# Altium PCB larar6.PcbDoc
Units mm, origin at the board's own origin, x right, y up, seen from the top; angles counter-clockwise.
Board outline 55.88 x 52.96 mm, 2 copper layers (Top Layer, Bottom Layer), stack 1.671 mm thick; 45 components, 51 nets, 267 pads, 125 vias.
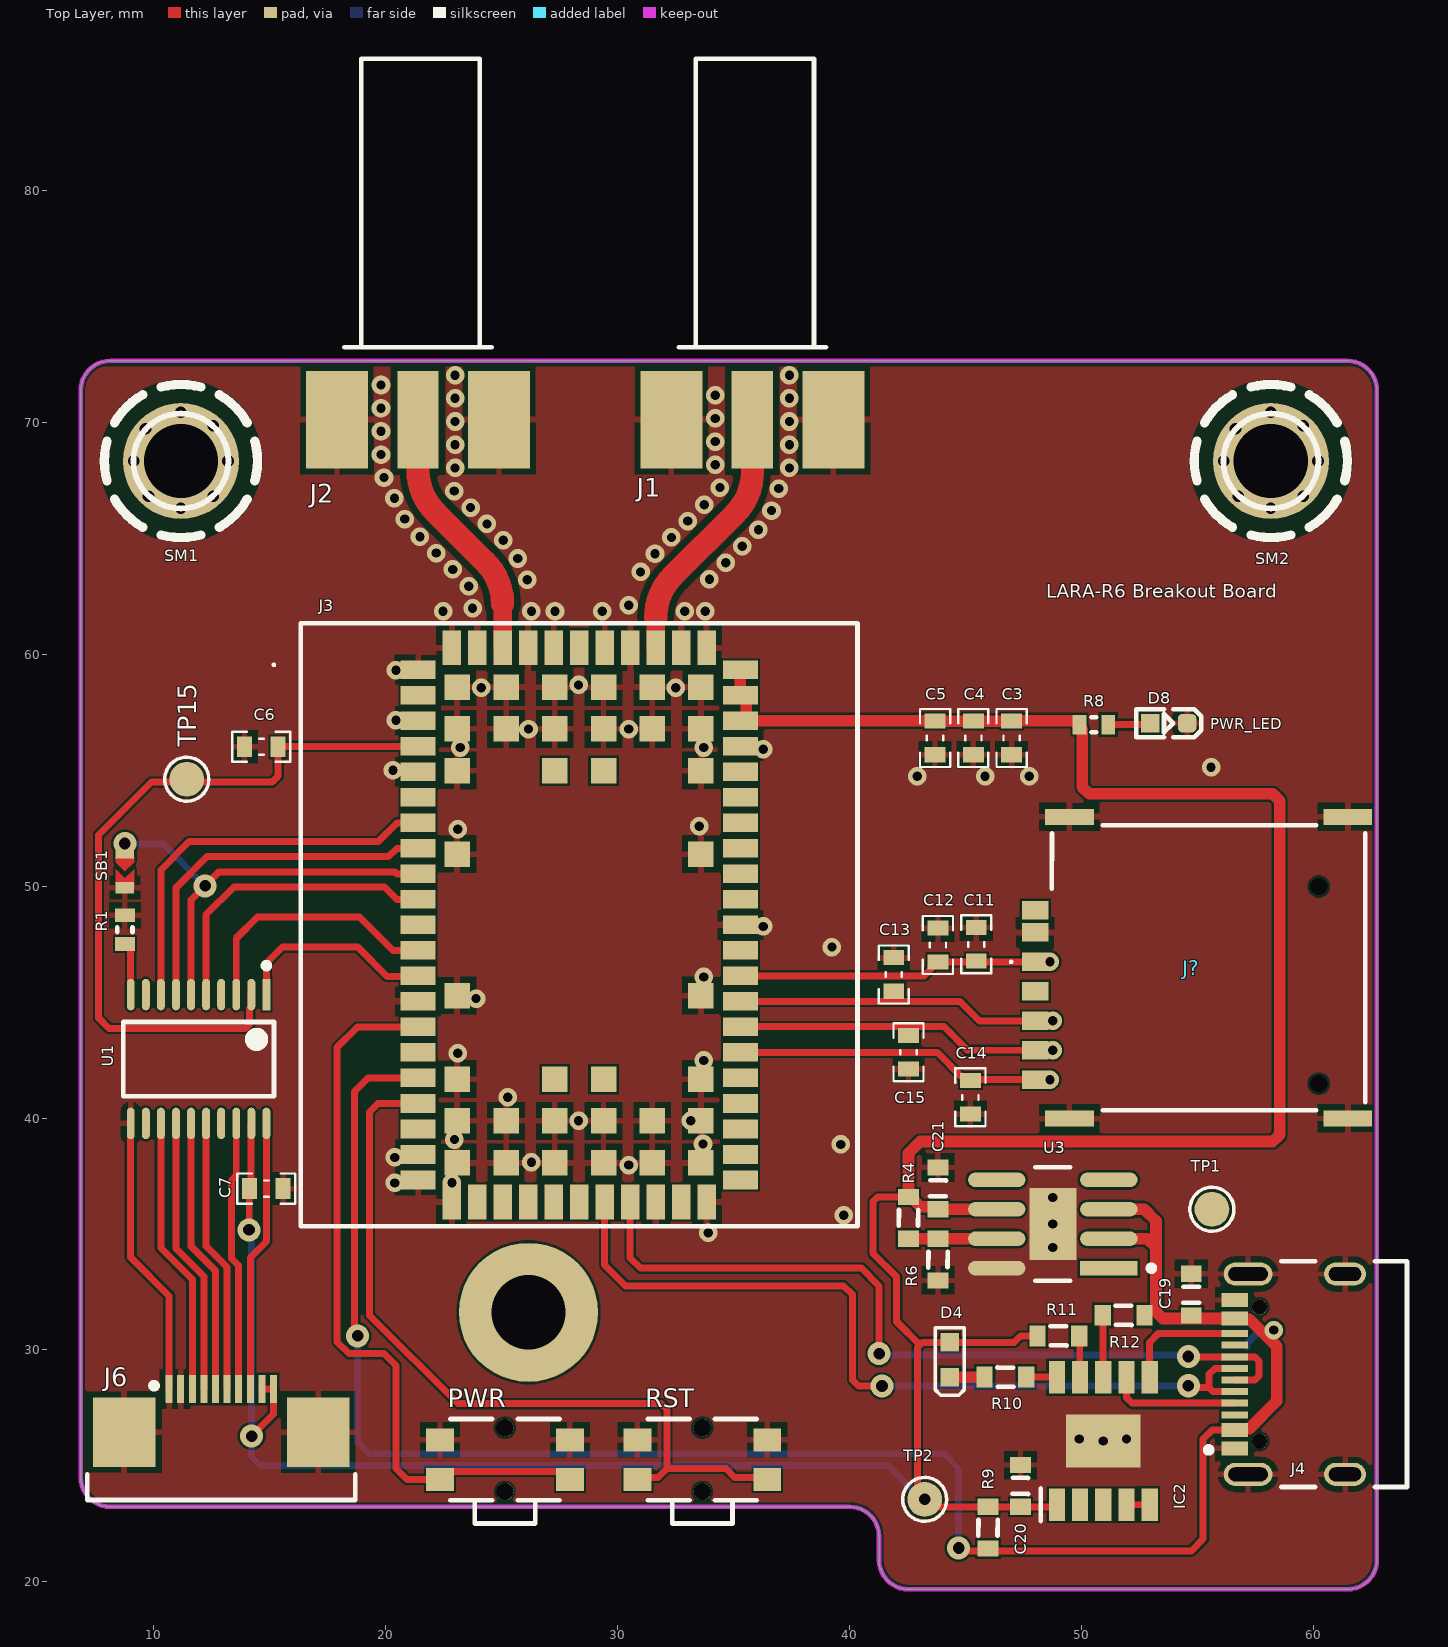
[diagram p0: Top Layer view]
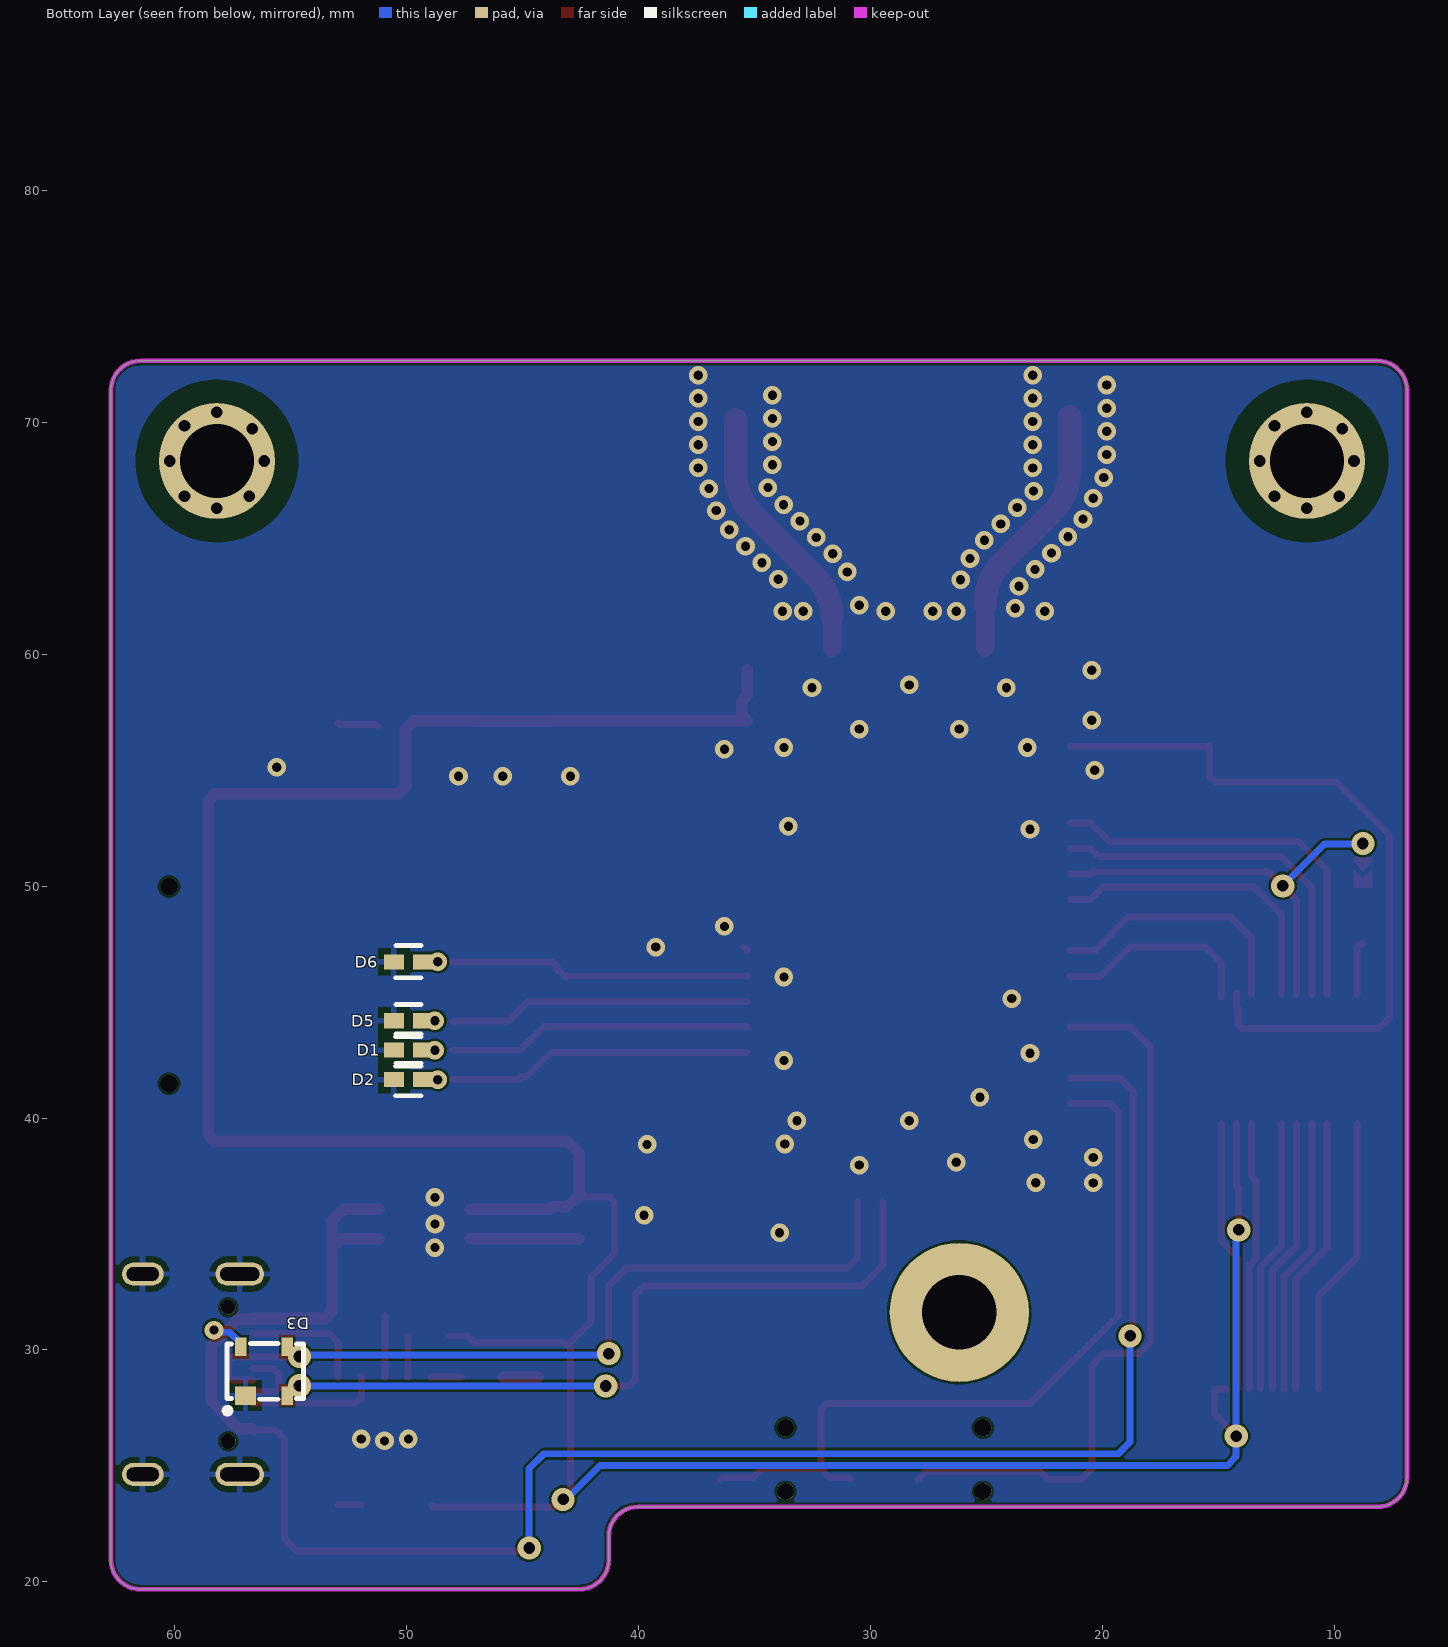
[diagram p1: Bottom Layer view, seen from below]
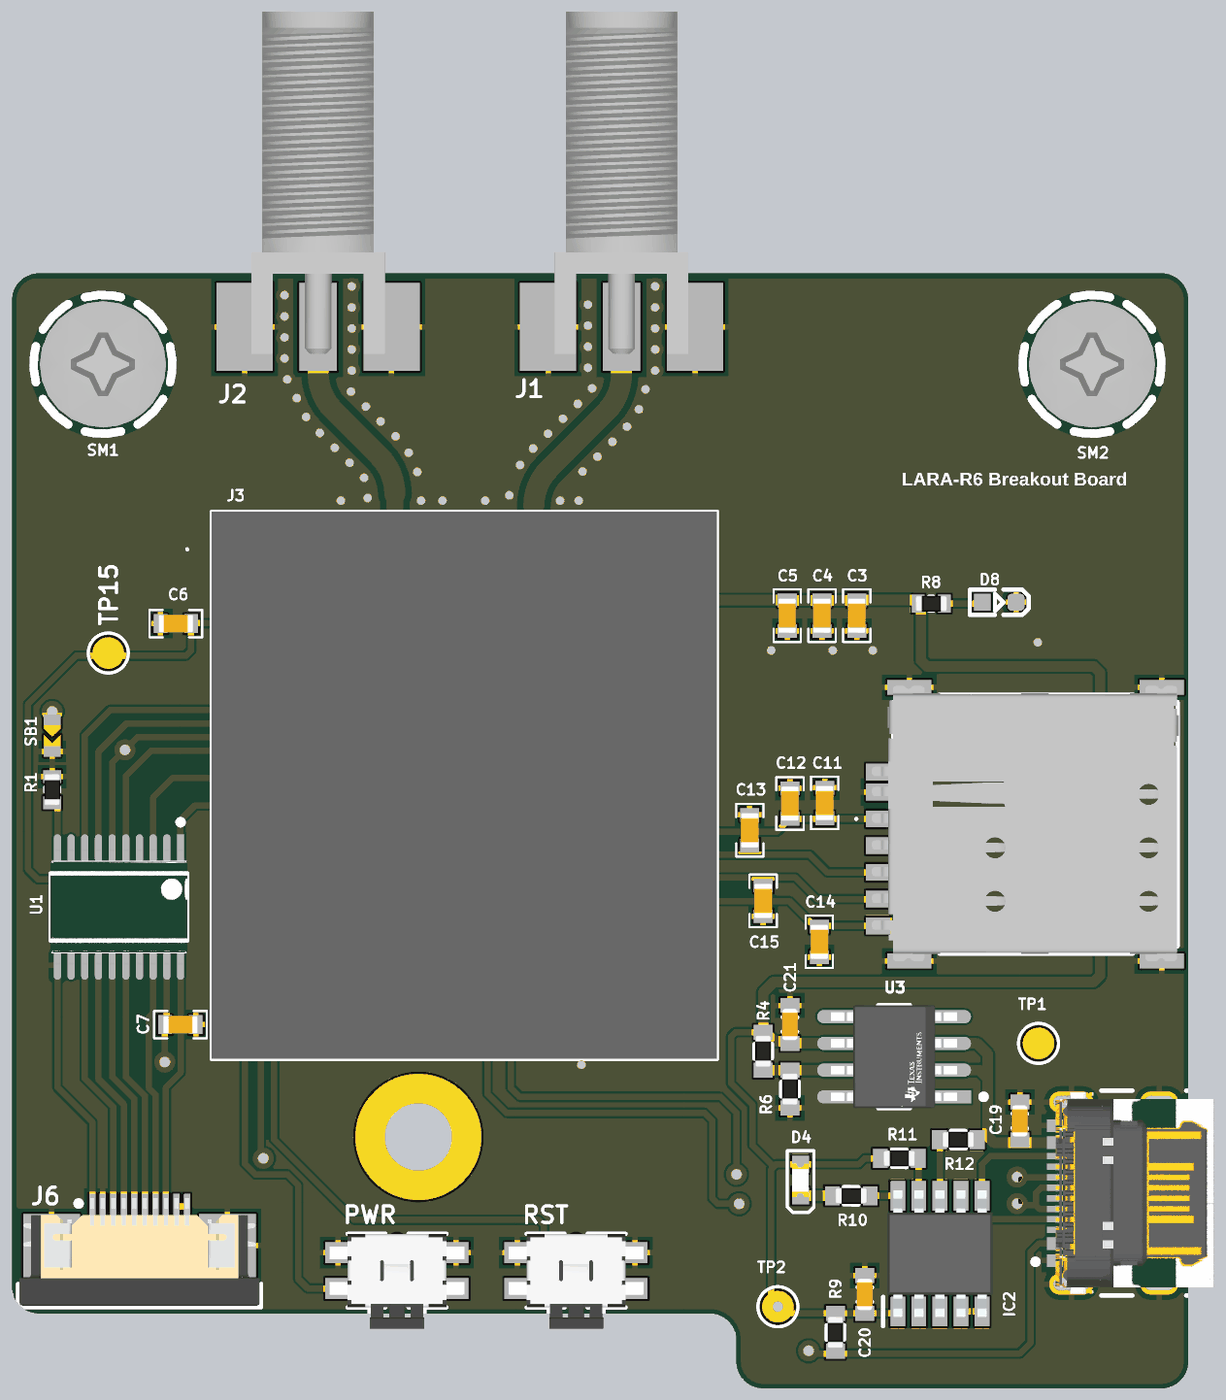
[diagram p2: 3D render of the assembled board from above, using the file's embedded part models]
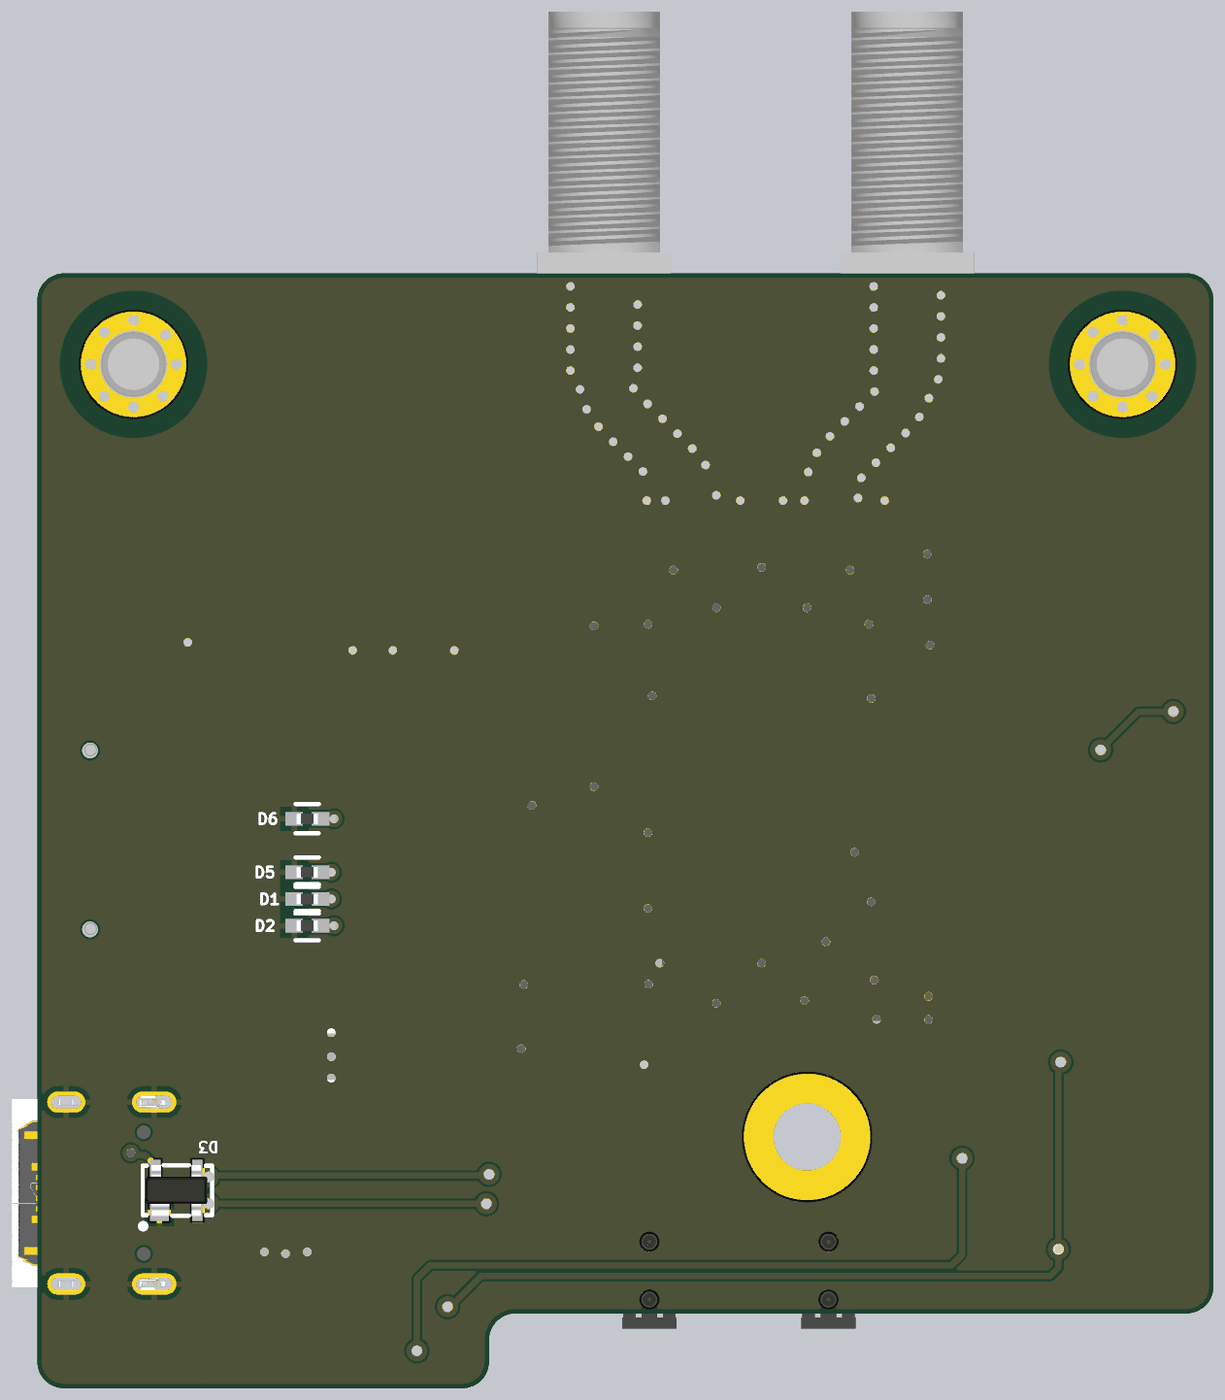
[diagram p3: 3D render of the assembled board from below, using the file's embedded part models]

## Layer stack, top to bottom
Top Solder: solder mask 0.0102, Solder Resist, Dk 3.5
Top Layer: signal copper 0.0356
Dielectric 1: dielectric 1.6, FR-4, Dk 4.8
Bottom Layer: signal copper 0.0356
Bottom Solder: solder mask 0.0102, Solder Resist, Dk 3.5

## Board outline
8.128,23.241 cw(c8.128,24.511) 6.858,24.511 6.858,71.374 cw(c8.128,71.374) 8.128,72.644 61.468,72.644 cw(c61.468,71.374) 62.738,71.374 62.738,20.955 cw(c61.468,20.955) 61.468,19.685 42.545,19.685 cw(c42.545,20.955) 41.275,20.955 41.275,21.971 ccw(c40.005,21.971) 40.005,23.241

## Design rules (kind name [scope] priority, off if disabled: settings)
Clearance Clearance_1 [InNet('ANT1')   or InNet('ANT2')] p1: gap=0.3 ignorepadtopadclearanceinfootprint=FALSE
Clearance [All] p2: gap=0.1 ignorepadtopadclearanceinfootprint=FALSE
PolygonConnect PolygonConnect_2 [HasFootprint('SOP100P600X180-11N')    or         HasFootprint('FP-DDA0008E-IPC_A')] p1: connectstyle=Direct reliefconductorwidth=0.254 reliefentries=4 polygonreliefangle="90 Angle" airgapwidth=0.254
PolygonConnect PolygonConnect_1 [All vs IsVia] p2: connectstyle=Direct reliefconductorwidth=0.254 reliefentries=4 polygonreliefangle="90 Angle" airgapwidth=0.254
PolygonConnect [All] p3: connectstyle=Relief reliefconductorwidth=0.254 reliefentries=4 polygonreliefangle="90 Angle" airgapwidth=0.254
RoutingVias [All] p1: holewidth=0.4 width=0.8 viastyle="Through Hole" minholewidth=0.4 minwidth=0.7 maxholewidth=0.5 maxwidth=1
SolderMaskExpansion [All] p1: expansion=0.102 istentingtop=FALSE
Width [All] p1: maxlimit=1 minlimit=0.2 preferedwidth=0.3
30 further rules are at their usual default settings.

## Classes and differential pairs
component class USB: C19 C20 C21 D3 D4 IC2 J4 R4 R6 R9 R10 R11 R12 U3
component class larar6: C3 C4 C5 C6 C7 C11 C12 C13 C14 C15 D1 D2 D5 D6 D8 J1 J2 J3 J6 J? PWR R1 R8 RST SB1 SM1 SM2 TP1 TP2 TP15 U1

## Components (designator, comment, footprint, x,y, rotation, side; value= is the part's Value field where it differs from the comment)
C3 "0.1uF" CAP0603 46.99,56.388 r90 top value=100nF
C4 "68pF" CAP0603 45.339,56.388 r90 top value=100nF
C5 "15pF" CAP0603 43.688,56.388 r90 top value=100nF
C6 "0.1UF" CAP0603 14.642,56.007 r180 top value=100pF
C7 "0.1UF" CAP0603 14.859,36.957 r0 top value=100pF
C11 "100nF" CAP0603 45.466,47.488 r270 top
C12 "47pF" CAP0603 43.815,47.461 r270 top value=100nF
C13 "47pF" CAP0603 41.91,46.191 r270 top value=100nF
C14 "47pF" CAP0603 45.212,40.894 r90 top value=100nF
C15 "47pF" CAP0603 42.545,42.836 r90 top value=100nF
C19 "10uF" C603 54.737,32.385 r270 top
C20 "10uF" C603 47.371,24.141 r270 top
C21 "1uF" C603 43.815,36.968 r270 top
D1 "PESD0402-140" FP-PESD0402-MFG 49.911,42.926 r180 bottom value=0.25pF
D2 "PESD0402-140" FP-PESD0402-MFG 49.911,41.656 r180 bottom value=0.25pF
D3 "PRTR5V0U2X" SOT-143B 56.134,29.083 r180 bottom
D4 "LED" led-0603 44.323,30.329 r270 top
D5 "PESD0402-140" FP-PESD0402-MFG 49.911,44.196 r180 bottom value=0.25pF
D6 "PESD0402-140" FP-PESD0402-MFG 49.911,46.736 r180 bottom value=0.25pF
D8 "PWR_LED" "LED SMD 0603 (Red)" 53.759,57.023 r0 top
IC2 "CH224K" SOP100P600X180-11N 50.943,26.079 r90 top
J1 "73251-2123" 73251-2123 35.814,73.219 r0 top
J2 "73251-2123" 73251-2123 21.399,73.219 r0 top
J3 "LARA-R6001-00B" LARAR600100B 28.346,48.328 r0 top
J4 "USB4105-GF-A" FP-USB4105-GF-A-MFG 60.198,28.956 r90 top
J6 "68711014522" 68711014522 12.918,25.761 r0 top
J? "XKNANO-113" XKNANO113 55.118,46.482 r90 top
PWR "436331045822" 436331045822 25.146,25.273 r0 top
R1 "100K" RES0603_(1608X06L) 8.763,47.498 r90 top
R4 "200K" R0603 42.545,35.698 r90 top
R6 "30K" R0603 43.815,33.898 r90 top
R8 "220" RES0603_(1608X06L) 51.156,56.959 r180 top
R9 "1K" R0603 45.974,22.341 r270 top
R10 "1K" R0603 46.725,28.829 r180 top
R11 "10K" R0603 49.011,30.607 r180 top
R12 "10K" R0603 51.816,31.496 r0 top
RST "436331045822" 436331045822 33.655,25.273 r0 top
SB1 "SolderBridge" SB-NO 8.763,50.935 r270 top
SM1 "Screw M3_1" Screw-Chsh-M3 11.176,68.326 r0 top
SM2 "Screw M3_1" Screw-Chsh-M3 58.166,68.326 r0 top
TP1 "Ø1.5mm,SMD" TP_SMD_Ø1.5mm 55.626,36.068 r0 top
TP2 "Ø1.5mm,SMD" TP_SMD_Ø1.5mm 43.243,23.558 r0 top
TP15 "Ø1.5mm,SMD" TP_SMD_Ø1.5mm 11.43,54.61 r0 top
U1 "TXS0108EPWR" FP-PW0020A-IPC_C 11.938,42.545 r270 top
U3 "TPS7A7002DDAR" FP-DDA0008E-IPC_A 48.765,35.433 r180 top

## Footprints (in the part's own frame and the unit in brackets; to place one, negate y for a bottom-side part, rotate by r counter-clockwise, add the part's x,y. Pads: shape width x height; smd on the part's side, far side on the other; paste and mask are expansions set on the pad)
73251-2123 [mm]
  rect 2.665x4.19 smd: 1(-3.492,-3.115) 2(3.492,-3.115)
  rect 1.78x4.19 smd: 3(0,-3.115)
  silkscreen extent -3.17,0.01 3.17,12.45, body extent -3.17,-4.41 3.17,11.85, height 6.36
68711014522 [mm] "ZIF Connectors, Horizontal, Bottom Contact, pitch 0.5mm, 10p"
  rect 0.3x1.2 smd: 1(-2.25,2.56) 2(-1.75,2.56) 3(-1.25,2.56) 4(-0.75,2.56) 5(-0.25,2.56) 6(0.25,2.56) 7(0.75,2.56) 8(1.25,2.56) 9(1.75,2.56) 10(2.25,2.56)
  rect 2.7x3 smd: M1(-4.18,0.7) M2(4.18,0.7)
  silkscreen extent -5.77,-2.22 5.78,2.82, body extent -5.7,-2.15 5.7,2.95, height 2.1
436331045822 [mm] "3.5x4.7 mm SMD side push"
  rect 1.2x1 smd: A1(-2.8,0.85) A2(2.8,0.85) B1(-2.8,-0.85) B2(2.8,-0.85)
  round 0.75 hole 0.75 unplated: MH1(0,1.375) MH2(0,-1.375)
  silkscreen extent -2.35,-2.75 2.35,1.75, body extent -3.2,-2.75 3.2,1.75, height 1.65
C603 [mm]
  rect 0.7x0.9 smd: 1(-0.9,0) 2(0.9,0)
  silkscreen extent -0.35,-0.34 0.35,0.34, body extent -0.76,-0.38 0.76,0.38, height 0.6
CAP0603 [mm] "Chip Capacitor, 2-Leads, Body 1/60x0/80mm, IPC Medium Density DESIGNER:ABBAS BASEREH"
  rect 0.65x0.9 smd: 1(-0.725,0) 2(0.725,0)
  silkscreen extent -1.25,-0.65 1.25,0.65, body extent -0.82,-0.43 0.82,0.43, height 0.4
FP-DDA0008E-IPC_A [mm]
  rect 2.474x0.622 smd paste+0 mask+0: 1(-2.416,1.905)
  rrect100% 2.474x0.622 smd paste+0 mask+0: 2(-2.416,0.635) 3(-2.416,-0.635) 4(-2.416,-1.905) 5(2.416,-1.905) 6(2.416,-0.635) 7(2.416,0.635) 8(2.416,1.905)
  rect 2.025x3.1 smd paste-1000 mask+0: 9(0,0)
  silkscreen extent -4.38,-2.45 0.75,2.45, body extent -4.15,-2.95 4.15,2.95, height 0.25
FP-PESD0402-MFG [mm]
  rect 0.85x0.65 smd paste+0 mask+0: 1(-0.625,0) 2(0.625,0)
  silkscreen extent -0.56,-0.69 0.55,0.7, body extent -0.5,-0.25 0.5,0.25, height 0.43
FP-PW0020A-IPC_C [mm]
  rect 1.355x0.341 smd paste+0 mask+0: 1(-2.775,2.925)
  rrect100% 1.355x0.341 smd paste+0 mask+0: 2(-2.775,2.275) 3(-2.775,1.625) 4(-2.775,0.975) 5(-2.775,0.325) 6(-2.775,-0.325) 7(-2.775,-0.975) 8(-2.775,-1.625) 9(-2.775,-2.275) 10(-2.775,-2.925) 11(2.775,-2.925) 12(2.775,-2.275) 13(2.775,-1.625) 14(2.775,-0.975) 15(2.775,-0.325) 16(2.775,0.325) 17(2.775,0.975) 18(2.775,1.625) 19(2.775,2.275) 20(2.775,2.925)
  silkscreen extent -4.15,-3.25 1.6,3.25, body extent -3.55,-3.35 3.55,3.35, height 0.25
FP-USB4105-GF-A-MFG [mm]
  rrect100% 1x2.1 hole 1.7 slot 0.6 at 0 deg paste-2539.97 mask+0: 1(-4.32,3.015) 2(4.32,3.015)
  rrect100% 1x1.8 hole 1.4 slot 0.6 at 0 deg paste-2539.97 mask+0: 3(-4.32,-1.165) 4(4.32,-1.165)
  rect 0.6x1.15 smd paste+0 mask+0: A1-B12(-3.2,3.59) A4-B9(-2.4,3.59) B1-A12(3.2,3.59) B4-A9(2.4,3.59)
  rect 0.3x1.15 smd paste+0 mask+0: A5(-1.25,3.59) A6(-0.25,3.59) A7(0.25,3.59) A8(1.25,3.59) B5(1.75,3.59) B6(0.75,3.59) B7(-0.75,3.59) B8(-1.75,3.59)
  round 0.65 hole 0.65 unplated paste-2539.97 mask+0: ""(-2.89,2.515) ""(2.89,2.515)
  silkscreen extent -4.86,-3.84 4.86,4.84, body extent -4.96,-3.94 4.96,4.27, height 0.25
LARAR600100B [mm]
  rect 1.5x0.8 smd: 1(-6.95,11) 2(-6.95,9.9) 3(-6.95,8.8) 4(-6.95,7.7) 5(-6.95,6.6) 6(-6.95,5.5) 7(-6.95,4.4) 8(-6.95,3.3) 9(-6.95,2.2) 10(-6.95,1.1) 11(-6.95,0) 12(-6.95,-1.1) 13(-6.95,-2.2) 14(-6.95,-3.3) 15(-6.95,-4.4) 16(-6.95,-5.5) 17(-6.95,-6.6) 18(-6.95,-7.7) 19(-6.95,-8.8) 20(-6.95,-9.9) 21(-6.95,-11) 33(6.95,-11) 34(6.95,-9.9) 35(6.95,-8.8) 36(6.95,-7.7) 37(6.95,-6.6) 38(6.95,-5.5) 39(6.95,-4.4) 40(6.95,-3.3) 41(6.95,-2.2) 42(6.95,-1.1) 43(6.95,0) 44(6.95,1.1) 45(6.95,2.2) 46(6.95,3.3) 47(6.95,4.4) 48(6.95,5.5) 49(6.95,6.6) 50(6.95,7.7) 51(6.95,8.8) 52(6.95,9.9) 53(6.95,11)
  rect 0.8x1.5 smd: 22(-5.5,-11.95) 23(-4.4,-11.95) 24(-3.3,-11.95) 25(-2.2,-11.95) 26(-1.1,-11.95) 27(0,-11.95) 28(1.1,-11.95) 29(2.2,-11.95) 30(3.3,-11.95) 31(4.4,-11.95) 32(5.5,-11.95) 54(5.5,11.95) 55(4.4,11.95) 56(3.3,11.95) 57(2.2,11.95) 58(1.1,11.95) 59(0,11.95) 60(-1.1,11.95) 61(-2.2,11.95) 62(-3.3,11.95) 63(-4.4,11.95) 64(-5.5,11.95)
  rect 1.1x1.1 smd: 65(-5.25,10.25) 66(-3.15,10.25) 67(-1.05,10.25) 68(1.05,10.25) 69(3.15,10.25) 70(5.25,10.25) 71(-5.25,8.45) 72(-3.15,8.45) 73(-1.05,8.45) 74(1.05,8.45) 75(3.15,8.45) 76(5.25,8.45) 77(-5.25,6.65) 78(5.25,6.65) 79(-5.25,3.05) 80(5.25,3.05) 81(-5.25,-3.05) 82(5.25,-3.05) 83(-5.25,-6.65) 84(5.25,-6.65) 85(-5.25,-8.45) 86(-3.15,-8.45) 87(-1.05,-8.45) 88(1.05,-8.45) 89(3.15,-8.45) 90(5.25,-8.45) 91(-5.25,-10.25) 92(-3.15,-10.25) 93(-1.05,-10.25) 94(1.05,-10.25) 95(3.15,-10.25) 96(5.25,-10.25) 97(-1.05,6.65) 98(1.05,6.65) 99(-1.05,-6.65) 100(1.05,-6.65)
  silkscreen extent -13.21,-13 12,13, body extent -12,-13 12,13, height 2.97
"LED SMD 0603 (Red)" [mm] "(Make www.tarahiboard.com)"
  rect 0.8x0.8 smd mask+0.075: 1(-0.8,0)
  rrect50% 0.8x0.8 smd mask+0.075: 2(0.8,0)
  silkscreen extent -1.4,-0.6 1.4,0.6, body extent -0.8,-0.4 0.8,0.4, height 0.5
led-0603 [mm]
  rect 0.8x0.8 smd: 1(0,0) 2(1.5,0)
  silkscreen extent -0.64,-0.64 2.29,0.64, body extent -0.04,-0.41 1.56,0.38, height 0.7
R0603 [mm]
  rect 0.7x0.9 smd: 1(-0.9,0) 2(0.9,0)
  silkscreen extent -0.34,-0.42 0.34,0.42, body extent -0.76,-0.38 0.76,0.38, height 0.45
RES0603_(1608X06L) [mm] "Chip Resistor, 2-Leads, Body 1.6x0.8mm, IPC High Density _ (0.063W)"
  rect 0.6x0.85 smd: 1(0,0) 2(1.244,0)
  silkscreen extent 0.52,-0.33 0.72,0.33, body extent -0.14,-0.38 1.38,0.38, height 0.45
SB-NO [mm]
  rect 0.5x0.8 smd mask+0.1: 1(-0.5,0) 2(1,0)
  Top Layer region: 0.3,0 -0.1,0.4 -0.3,0.4 -0.3,-0.4 -0.1,-0.4
  Top Layer region: 0.2,0.4 1,0.4 1,-0.4 0.2,-0.4 0.6,0
Screw-Chsh-M3 [mm] "Screw, hole diameter 3.2mm, PanHead 6mm, (Make www.tarahiboard.com)"
  round 5 / inner round 3 / far side round 5 hole 3.2 mask+0.1: ""(0,0)
  Top Layer pour cut-out: 0,3.5 -1.339,3.234 -2.475,2.475 -3.234,1.339 -3.5,0 -3.5,0 -3.234,-1.339 -2.475,-2.475 -1.339,-3.234 0,-3.5 0,-3.5 1.75,-3.031 3.031,-1.75 3.5,0 3.5,0 3.233,1.339 2.475,2.475 1.339,3.234 0,3.5
  Bottom Layer pour cut-out: 0,3.5 -1.339,3.234 -2.475,2.475 -3.234,1.339 -3.5,0 -3.5,0 -3.234,-1.339 -2.475,-2.475 -1.339,-3.234 0,-3.5 0,-3.5 1.75,-3.031 3.031,-1.75 3.5,0 3.5,0 3.234,1.339 2.475,2.475 1.339,3.234 0,3.5
  silkscreen extent -3.3,-3.3 3.3,3.3, body extent -3,-3 3,3, height 2.53
SOP100P600X180-11N [mm]
  rect 1.4x0.7 smd: 1(-2.75,2) 2(-2.75,1) 3(-2.75,0) 4(-2.75,-1) 5(-2.75,-2) 6(2.75,-2) 7(2.75,-1) 8(2.75,0) 9(2.75,1) 10(2.75,2)
  rect 2.3x3.2 smd: 11(0,0)
  silkscreen extent -3.45,2.7 -2.05,2.7, body extent -3,-2.5 3,2.5, height 1.8
SOT-143B [mm]
  rect 0.9x0.8 smd: 1(-0.8,-1.05)
  rect 0.5x0.8 smd: 2(1,-1.05) 3(1,1.05) 4(-1,1.05)
  silkscreen extent -1.7,-1.82 1.7,1.2, body extent -1.46,-1.21 1.46,1.21, height 1
TP_SMD_Ø1.5mm [mm]
  round 1.5 smd paste-5: 1(0,0)
  silkscreen extent -0.95,-0.95 0.95,0.95
XKNANO113 [mm]
  rect 0.8x1.14 smd: C1(0.25,7.115) C2(-2.29,7.115) C3(-4.83,7.115) C5(1.52,7.115) C6(-1.02,7.115) C7(-3.56,7.115) CD1(2.47,7.115)
  round 0.375 hole 0.75 unplated: MH1(3.5,-5.115) MH2(-5,-5.115)
  rect 0.7x2.1 smd: MP1(6.5,5.635) MP2(-6.5,5.635) MP3(6.5,-6.365) MP4(-6.5,-6.365)
  silkscreen extent -6.14,-7.11 6.14,8.2, body extent -6.52,-7.17 6.58,7.41, height 1.77

## Part data
C3 C4 C5 C6 C7 C11 C12 C13 C14 C15: library part "CAP SMD PACKAGE", "TOTAL CAPACITOR SMD PACK", Data=2017-3-10, Desc.="CAP SMD TOTAL PACKAGES", Designer="Abbas Basereh"
C19 C20 C21: library part Cap, "Capacitor", Designer="Parsa Malekpour"
D1 D2 D5 D6: library part CMP-08607-000011-1, "TVS DIODE 14V 40V 0402", Breakdown Voltage=14V, Capacitance=0.25pF, Clamping Voltage=40V, Manufacturer="Littelfuse Inc.", Package=PESD0402, Temperature="-55°C to +125°C", Temperature Range High=+125°C, Temperature Range Low=-55°C, Automotive=Yes, Automotive Grade="Grade 1", Category=Diode, ComponentLink2Description=Datasheet, ComponentLink2URL=https://www.littelfuse.com/~/media/electronics/datasheets/polymer_esd_suppressors/littelfuse_polymer_esd_suppressor_pesd_catalog_datasheet.pdf.pdf, Device Class L1="Circuit Protection", Device Class L2="TVS Diodes", Device Class L3=unset, Digikey Description="TVS DIODE 14V 40V 0402", Direction=Bidirectional, Height=0.43mm, Ipc Land Pattern Name=DIOC10050X33, Lead Free=Yes, Manufacturer Part Number=PESD0402-140, Number Of Channels=1, Octopart=https://octopart.com/pesd0402-140-littelfuse-74215061, Reverse Standoff Voltage=14V, RoHS=TRUE
D3: "Ultra low capacitance double rail-to-rail ESD protection diode", Reverse Standoff Voltage=5.5V
D8: library part "LED SMD 0603", "LED SMD 0603", ComponentLink1Description=Tarahiboard, ComponentLink1URL=https://www.tarahiboard.com/product/library-pack, DatasheetVersion=2022
IC2: "Integrated Circuit", Manufacturer_Name=WCH, Datasheet Link=https://datasheet.lcsc.com/lcsc/2204251615_WCH-Jiangsu-Qin-Heng-CH224K_C970725.pdf, Height=1.8mm, Manufacturer_Part_Number=CH224K
J1 J2: "Connector", Manufacturer_Name=Molex, Mouser Part Number=538-73251-2123, Manufacturer_Part_Number=73251-2123, Mouser Price/Stock=https://www.mouser.co.uk/ProductDetail/Molex/73251-2123?qs=KpdAywxU010iaT6kySWldg%3D%3D
J3: "Connector", Manufacturer_Name=u-blox, Mouser Part Number=377-LARA-R6001-00B, Datasheet Link=https://content.u-blox.com/sites/default/files/LARA-R6_DataSheet_UBX-21004391.pdf, Height=2.87mm, Manufacturer_Part_Number=LARA-R6001-00B, Mouser Price/Stock=https://www.mouser.co.uk/ProductDetail/u-blox/LARA-R6001-00B?qs=Li%252BoUPsLEnu1nGRnflMQjg%3D%3D
J4: library part CMP-245163-000001-1, "CONN RCPT USB2.0 TYPEC 5A", Current Rating=5/6.25/1.25/0.25A, Manufacturer=GCT, Package=0, Temperature="-40°C to +85°C", Temperature Range High=+85°C, Temperature Range Low=-40°C, Voltage Rating=20V, Automotive=No, Category=Conn, ComponentLink2Description=Datasheet, ComponentLink2URL=https://gct.co/files/drawings/usb4105.pdf, Conn Orientation="Right Angle", Contact Material=Gold,Nickel, Device Class L1=Connectors, Device Class L2="USB Connectors", Device Class L3=unset, Digikey Description="CONN RCPT USB2.0 TYPEC 5A", Height=3.46mm, Is Female=yes, Lead Free=Yes, Manufacturer Part Number=USB4105-GF-A, Number Of Contacts=16, Octopart=https://octopart.com/usb4105-gf-a-gct-106627878, RoHS=TRUE, Usb Standard="USB 2.0"
J6: library part CMP-1502-01529-2, Contact Resistance=20mΩ, Current Rating=500mA, Flammability Rating="UL94 V-0", Insulation Resistance=100MΩ, Max Operating Temperature=85°C, Min Operating Temperature=-25°C, Operating Supply Voltage=50V, Actuator Material="Liquid Crystal Polymer, Polymer", Contact Location=Bottom, Contact Material=Tin, Contact Plating=Tin, Gender=Male, Height=2.25mm, Housing Material="Liquid Crystal Polymer", Lead Pitch=500µm, Length=11.4mm, Mount="Surface Mount", NexarPartId=8917690, Number Of Contacts=10, Number of Pins=10, Number of Positions=10, Number Of Rows=1, Orientation=Horizontal, Packaging="Tape and Reel", Pitch=500µm, REACH SVHC=Unknown, RoHS=Compliant, Termination=SMD/SMT, Voltage Rating=50V, Width=2.1mm
J?: "Connector", Manufacturer_Name="XKB Connectivity", Datasheet Link=https://datasheet.lcsc.com/lcsc/2110151630_XKB-Connectivity-XKNANO-113_C381071.pdf, Height=1.57mm, Manufacturer_Part_Number=XKNANO-113
PWR RST: library part CMP-1463-00001-3, Contact Current Rating=50mA, Contact Resistance=100mΩ, Insulation Resistance=100MΩ, Max Operating Temperature=85°C, Min Operating Temperature=-40°C, Voltage Rating=12V, Contact Plating=Silver, Current Rating=50mA, Height=1.65mm, Life (Cycles)=100kcycles, Mount="Surface Mount", NexarPartId=22862795, Packaging="Tape and Reel", RoHS=Compliant, Voltage Rating (DC)=12V, Width=4.7mm
R1 R8: library part "RES SMD PACKAGE", "TOTAL SMD RESISTOR PACK", Data=2017-3-10, Desc.="RES SMD PAKAGES", Designer="Abbas Basereh"
R4 R6 R9 R10 R11 R12: library part Resistor, "Resistor", Designer="Parsa Malekpour"
SM1 SM2: "Screw, hole diameter 3.2mm & 3.7mm, PanHead 5mm & 5.6mm & 6mm & 7mm", ComponentLink1Description="Website: Tarahiboard", ComponentLink1URL=https://www.tarahiboard.com/product/library-pack, DatasheetVersion=2022
TP1 TP2 TP15: library part TP_SMD_Ø1.5MM, "1.5mm circular SMD testpad", Manufacturer="Nordic Semiconductor", Manufacturer Part Number=N.A., Artikkelnr Noca=N.A., Component Class=Connectors, ComponentLink1Description=Datasheet, ComponentLink1URL=N.A., ComponentLink2Description="Supplier link", ComponentLink2URL=N.A., Footprint Doc=TP_SMD_Ø1.5mm, HelpURL=N.A., LatestRevisionDate=2016-06-02, Note=N.A., Pad Count=1, Part Number=TP_SMD_Ø1.5MM, Part number IPS=N.A., PartId=100500477, Published=2016-06-02, Supplier 1=N.A., Supplier 2=N.A., Supplier Part Number 1=N.A., Supplier Part Number 2=N.A.
U1: library part CMP-2000-04956-2, "IC TRNSLTR BIDIRECTIONAL 20TSSOP", Case/Package=TSSOP, High Level Output Current=-50mA, Low Level Output Current=50mA, Max Operating Temperature=85°C, Max Supply Voltage=5.5V, Min Operating Temperature=-40°C, Min Supply Voltage=1.2V, Nominal Supply Current=8uA, Output Current=620uA, Package Quantity=1, Quiescent Current=3uA, Contact Plating=Gold, Data Rate=60Mbps, Height=1.15mm, Lead Free="Lead Free", Length=6.5mm, Logic Function=Translator, Mount="Surface Mount", Number of Bits=8, Number Of Channels=8, Number of Inputs=8, Number of Pins=20, Output Type=Voltage, Packaging="Tape and Reel", Propagation Delay=4.8ns, Radiation Hardening=No, REACH SVHC="No SVHC", Rise Time=6.3ns, RoHS Compliant=Yes, Series=-, Supply Current=8uA, Termination=SMD/SMT, Turn-On Delay Time=312ns, Weight=0.002716oz, Width=4.4mm
U3: library part CMP-04917-000116-1, "IC REG LIN POS ADJ 3A 8SO PWRPAD", Dropout Voltage=200mV, Max Input Voltage=6.5V, Max Operating Temperature=125°C, Max Output Current=3A, Min Current Limit=3.36A, Min Input Voltage=1.425V, Min Operating Temperature=-40°C, Output Voltage=5V, Package Quantity=2500, Quiescent Current=3mA, Accuracy=3%, Contact Plating=Gold, Lead Free="Lead Free", Mount="Surface Mount", Number Of Outputs=1, Number of Pins=8, Number of Regulators=1, Output Current=3A, Output Type=Adjustable, Packaging="Tape and Reel", Polarity=Positive, RoHS Compliant=Yes

## Free pads (board coordinates)
  round 6 hole 3.2: 2(26.162,31.623)

## Via types
v1: diameter 0.8, hole 0.4, Top Layer to Bottom Layer, tented both sides, 98 vias
v2: diameter 0.8, hole 0.5, Top Layer to Bottom Layer, tented both sides, 16 vias
v3: diameter 1, hole 0.5, Top Layer to Bottom Layer, tented both sides, 11 vias

## Nets (pads, with @x,y where several pads share a name; then routed paths per layer and width w, separated by ;. In a path a pad name is that pad's centre, name@x,y a point inside that pad or via, vN(x,y) a via of type N, cw(c..) or ccw(c..) an arc to the next point about the centre after c; other vN are vias at no path point)
+1V8: C6.1 J3.4 TP15.1 U1.2 | length 32.2
  Top Layer w0.3: U1.2@14.194,45.396 14.205,45.385 14.205,44.794 14.142,44.731 14.142,44.036 13.966,43.86 8.083,43.86 7.62,44.323 7.62,52.197 9.909,54.486 10.157,54.486 10.16,54.483 11.43,54.483 15.113,54.483 15.367,54.737 C6.1 15.388,56.028 J3.4
+3V3: C3.2 C4.2 C5.2 C7.1 C20.2 C21.2 D4.1 IC2.1 J3.51 J3.52 J3.53 J6.9 J6.10 R4.2 R8.2 R9.1 R11.2 TP2.1 U1.19 U3.6 | length 139.8
  Top Layer w0.3: v3(14.113,35.179) 14.123,35.19 14.123,36.946 14.205,37.028 14.205,39.762 U1.19 ; v3(14.224,26.289) 15.168,27.233 J6.10 J6.9 ; R4.2 41.219,36.598 41.021,36.4 41.021,34.163 42.037,33.147 42.037,31.218 43.041,30.214 ; R11.2 47.371,30.607 47.093,30.329 D4.1 43.156,30.329 43.041,30.214 ; IC2.1 48.855,23.241 C20.2 43.561,23.241 v3(43.243,23.558) 42.926,23.876 42.926,30.099 43.041,30.214
  Top Layer w0.5: J3.51 J3.51@35.37,57.202 ; J3.53 J3.52 35.546,57.978 35.546,57.378 J3.51@35.37,57.202 ; R4.2 42.545,38.481 43.053,38.989 58.254,38.989 58.547,39.282 58.547,53.682 58.254,53.975 50.331,53.975 50.038,54.268 50.038,56.769 49.676,57.131 47.008,57.131 C3.2 C4.2 C5.2 ; R4.2@42.645,36.598 43.075,36.168 43.715,36.168 C21.2 U3.6@47.238,36.068 ; C5.2@43.803,57.128 35.445,57.128 J3.51@35.37,57.202
  Bottom Layer w0.3: v3(14.113,35.179) 14.224,35.068 14.224,25.4 14.605,25.019 41.656,25.019 43.053,23.622 43.18,23.622 v3(43.243,23.558)
+5V0: TP1.1
ANT1: J1.3 J3.56 | length 11.3
  Top Layer w0.8: J3.56 31.646,61.589
  Top Layer w1: 31.646,61.589 cw(c34.169,61.589) 32.385,63.373 35.07,66.058 ccw(c33.274,67.854) 35.814,67.854 J1.3
ANT2: J2.3 J3.62 | length 11.2
  Top Layer w0.8: J3.62 25.046,62.167
  Top Layer w1: J2.3@21.399,70.231 21.399,67.918 ccw(c23.939,67.918) 22.143,66.122 24.302,63.963 cw(c22.506,62.167) 25.046,62.167
CC1: IC2.7 J4.A5 | length 5.7
  Top Layer w0.3: IC2.7 51.943,27.94 52.177,27.706 J4.A5
CC2: IC2.6 J4.B5 | length 5.3
  Top Layer w0.3: IC2.6 52.943,30.305 52.927,30.321 53.312,30.706 J4.B5
CTS_18: J3.11
DCD_18: J3.8 U1.7 | length 15.7
  Top Layer w0.3: U1.7 10.963,49.93 12.3,51.267 20.135,51.267 20.496,51.628 J3.8
DSR_18: J3.6
DTR_18: J3.9 SB1.1 U1.6 | length 18.6
  Top Layer w0.3: U1.6 11.613,49.403 v3(12.22,50.01) 12.827,50.617 20.407,50.617 20.496,50.528 J3.9
  Bottom Layer w0.3: v3(8.763,51.835) 8.782,51.816 10.414,51.816 v3(12.22,50.01)
GND: C3.1 C4.1 C5.1 C6.2 C7.2 C11.1 C12.1 C13.1 C14.1 C15.1 C19.1 C20.1 C21.1 D1.1 D2.1 D3.1 D5.1 D6.1 D8.2 IC2.11 J1.1 J1.2 J2.1 J2.2 J3.1 J3.3 J3.5 J3.14 J3.20 J3.21 J3.22 J3.30 J3.32 J3.43 J3.50 J3.54 J3.55 J3.57 J3.58 J3.60 J3.61 J3.63 J3.64 J3.65 J3.66 J3.67 J3.68 J3.69 J3.70 J3.71 J3.72 J3.73 J3.74 J3.75 J3.76 J3.77 J3.78 J3.79 J3.80 J3.81 J3.82 J3.83 J3.84 J3.85 J3.86 J3.87 J3.88 J3.89 J3.90 J3.91 J3.92 J3.93 J3.94 J3.95 J3.96 J4.1 J4.2 J4.3 J4.4 J4.A1-B12 J4.B1-A12 J6.1 J6.2 J6.M1 J6.M2 J?.C5 J?.MP1 J?.MP2 J?.MP3 J?.MP4 PWR.A1 PWR.A2 R1.2 R6.1 RST.A1 RST.A2 SB1.2 U1.11 U3.8 U3.9 | length 12.1
  Top Layer w0.3: U1.11 9.013,33.984 10.668,32.329 J6.1
  other v1: 50.943,26.079 49.911,26.162 51.943,26.162 48.768,34.417 33.909,35.052 48.765,35.433 39.751,35.814 48.768,36.576 20.392,37.201 22.86,37.211 30.48,37.973 26.289,38.1 20.392,38.301 39.624,38.862 33.685,38.882 22.969,39.074 28.321,39.878 33.162,39.878 25.273,40.894 33.723,42.482 23.114,42.799 23.9,45.151 33.723,46.082 39.243,47.371 36.288,48.26 23.114,52.451 33.528,52.578 42.926,54.737 45.847,54.737 47.752,54.737 20.32,54.991 55.588,55.118 36.288,55.901 23.223,55.974 33.723,55.974 26.162,56.769 30.48,56.769 20.447,57.15 24.13,58.547 32.512,58.547 28.321,58.674 20.447,59.309 22.479,61.849 26.289,61.849 27.305,61.849 29.337,61.849 32.893,61.849 33.782,61.849 23.749,61.976 30.48,62.103 23.588,62.932 26.108,63.21 33.964,63.232 30.993,63.543 22.894,63.652 34.671,63.939 25.701,64.123 31.617,64.324 22.187,64.359 35.378,64.646 25.078,64.906 32.324,65.031 21.48,65.066 36.074,65.364 24.371,65.613 33.031,65.738 20.828,65.825 36.638,66.19 23.664,66.32 33.738,66.445 20.383,66.72 22.959,67.029 36.955,67.139 34.413,67.183 19.931,67.612 22.996,68.029 37.41,68.029 34.218,68.164 19.803,68.604 22.996,69.029 37.41,69.029 34.218,69.164 19.803,69.604 22.996,70.029 37.41,70.029 34.218,70.164 19.803,70.604 22.996,71.029 37.41,71.029 34.218,71.164 19.803,71.604 22.996,72.029 37.41,72.029
I2S_CLK_18: J3.36
I2S_RXA_18: J3.37
I2S_TXA_18: J3.35
I2S_WA_18: J3.34
IO1_18: J3.16
IO2_18: J3.23
IO3_18: J3.24
IO4_18: J3.25
IO6_18: J3.19
NetD4_2: D4.2 R10.2 | length 1.5
  Top Layer w0.5: D4.2 R10.2
NetD8_1: D8.1 R8.1 | length 1.8
  Top Layer w0.3: R8.1@51.219,56.896 51.283,56.959 52.876,56.959 D8.1@52.939,57.023
NetIC2_4: IC2.4 IC2.5 | length 1
  Top Layer w0.3: IC2.4 IC2.5
NetIC2_8: IC2.8 R12.1 | length 2.7
  Top Layer w0.3: R12.1 50.929,31.482 50.929,28.843 IC2.8
NetIC2_9: IC2.9 R11.1 | length 1.8
  Top Layer w0.3: R11.1 49.927,30.591 49.927,28.845 IC2.9
NetIC2_10: IC2.10 R10.1 | length 1.3
  Top Layer w0.3: R10.1 IC2.10
NetJ6_3: J6.3 U1.13 | length 12
  Top Layer w0.3: U1.13 10.313,34.391 11.668,33.036 J6.3
NetJ6_4: J6.4 U1.14 | length 11.9
  Top Layer w0.3: U1.14 10.963,34.368 12.168,33.163 J6.4
NetJ6_5: J6.5 U1.15 | length 11.9
  Top Layer w0.3: U1.15 11.613,34.472 12.668,33.417 J6.5
NetJ6_6: J6.6 U1.16 | length 11.8
  Top Layer w0.3: U1.16 12.263,34.476 13.168,33.571 J6.6
NetJ6_7: J6.7 U1.18 | length 11.7
  Top Layer w0.3: U1.18 13.563,37.515 13.363,37.315 13.363,33.942 13.668,33.637 J6.7
NetJ6_8: J6.8 U1.20 | length 11.7
  Top Layer w0.3: J6.8 14.168,33.98 14.863,34.675 U1.20
NetR1_1: R1.1 U1.10 | length 2.3
  Top Layer w0.3: R1.1 8.863,47.498 9.013,47.348 U1.10
NetR4_1: R4.1 R6.2 U3.7 | length 4.7
  Top Layer w0.5: R4.1 R6.2 U3.7@47.238,34.798
PWR_ON_N: J3.15 PWR.B1 PWR.B2 | length 31.9
  Top Layer w0.3: J3.15 18.782,43.928 17.907,43.053 17.907,30.353 18.415,29.845 19.939,29.845 20.447,29.337 20.447,24.892 20.916,24.423 PWR.B1 22.688,24.765 27.604,24.765 PWR.B2
RESET_N: J3.18 RST.B1 RST.B2 | length 34
  Top Layer w0.3: J3.18 19.673,40.628 19.304,40.259 19.304,31.496 23.114,27.686 31.877,27.686 32.131,27.432 32.131,24.892 ; RST.B1 30.943,24.511 31.75,24.511 32.131,24.892 ; RST.B2 36.367,24.511 35.052,24.511 34.671,24.892 32.131,24.892
RI_18: J3.7 U1.8 | length 17.3
  Top Layer w0.3: U1.8 10.313,50.699 11.531,51.917 19.685,51.917 20.496,52.728 J3.7
RTS_18: J3.10 U1.5 | length 13.3
  Top Layer w0.3: U1.5 12.263,48.768 13.462,49.967 19.957,49.967 20.496,49.428 J3.10
RXD_18: J3.13 U1.1 | length 8.8
  Top Layer w0.3: U1.1@14.859,45.21 14.859,46.676 15.55,47.367 18.8,47.367 20.066,46.101 21.369,46.101 J3.13
SCL_18: J3.27
SDA_18: J3.26
SIM_CLK: C14.2 D2.2 J3.38 J?.C3 | length 13.2
  Top Layer w0.3: J3.38 43.786,42.828 44.82,41.794 45.07,41.794 45.212,41.652 J?.C3
  other v1: 48.641,41.656
SIM_DET: J3.42 | length 0.2
  Top Layer w0.3: J3.42 J3.42@35.441,47.373
SIM_IO: C15.2 D1.2 J3.39 J?.C7 | length 13.1
  Top Layer w0.3: J3.39 35.31,43.942 44.069,43.942 45.089,42.922 J?.C7
  other v1: 48.768,42.926
SIM_RST: C13.2 D5.2 J3.40 J?.C2 | length 13.1
  Top Layer w0.3: J3.40 44.761,45.028 45.597,44.192 J?.C2
  other v1: 48.768,44.196
TXD_18: J3.12 U1.3 | length 11.2
  Top Layer w0.3: U1.3 13.563,47.752 14.478,48.667 18.881,48.667 20.32,47.228 J3.12
USB_N: D3.2 J3.28 J4.A7 J4.B7 | length 36.1
  Top Layer w0.3: J3.28 29.446,33.673 30.353,32.766 39.751,32.766 40.132,32.385 40.132,28.702 40.386,28.448 v3(41.402,28.448) ; v3(54.61,28.456) 54.684,28.382 55.499,28.382 ; J4.B7 55.675,28.206 55.499,28.382 ; J4.A7 55.757,29.206 55.753,29.21 55.499,28.956 55.499,28.382
  Bottom Layer w0.3: v3(41.402,28.448) 41.406,28.452 54.606,28.452 v3(54.61,28.456)
USB_P: D3.3 J3.29 J4.A6 J4.B6 | length 34.8
  Top Layer w0.3: J3.29 30.546,33.97 30.988,33.528 40.513,33.528 41.275,32.766 v3(41.275,29.845) ; v3(54.61,29.718) 54.622,29.706 J4.B6 57.482,29.706 57.658,29.53 57.658,28.882 57.482,28.706 J4.A6
  Bottom Layer w0.3: v3(41.275,29.845) 41.338,29.781 54.546,29.781 v3(54.61,29.718)
VBUS: C19.2 D3.4 J3.17 J4.A4-B9 J4.B4-A9 R9.2 R12.2 U3.2 U3.3 | length 85
  Top Layer w0.3: v3(18.796,30.607) 18.669,30.734 18.669,41.148 19.249,41.728 J3.17 ; v3(44.704,21.463) 44.831,21.336 54.737,21.336 55.248,21.847 55.248,22.095 55.245,22.098 55.245,26.162 55.639,26.556 J4.A4-B9
  Top Layer w0.5: U3.2 52.832,34.798 53.213,34.417 ; U3.3 52.705,36.068 53.213,35.56 53.213,34.417 ; J4.A4-B9 56.658,26.606 57.228,26.606 58.42,27.798 58.42,30.154 57.241,31.333 56.631,31.333 J4.B4-A9 53.506,31.356 53.213,31.649 53.213,34.417
  Bottom Layer w0.3: v3(18.796,30.607) 18.796,26.035 19.304,25.527 44.069,25.527 44.704,24.892 v3(44.704,21.463) ; D3.4 57.134,30.283 57.616,30.765 58.197,30.765 v1(58.293,30.861)
VSIM: C11.2 C12.2 D6.2 J3.41 J?.C1 | length 13
  Top Layer w0.3: J3.41 43.211,46.128 43.515,46.432 43.515,46.561 43.686,46.732 45.466,46.732 J?.C1
  other v1: 48.641,46.736
pads on no net: IC2.2 IC2.3 J3.2 J3.31 J3.33 J3.44 J3.45 J3.46 J3.47 J3.48 J3.49 J3.59 J3.97 J3.98 J3.99 J3.100 J4. J4.A8 J4.B8 J?.C6 J?.CD1 J?.MH1 J?.MH2 PWR.MH1 PWR.MH2 RST.MH1 RST.MH2 SM1. SM2. U1.4 U1.9 U1.12 U1.17 U3.1 U3.4 U3.5
copper on no net:
  other v2: 11.176,66.294 58.166,66.294 9.779,66.802 12.573,66.802 56.769,66.802 59.563,66.802 9.144,68.326 13.208,68.326 56.134,68.326 60.198,68.326 9.652,69.723 56.642,69.723 12.573,69.85 59.563,69.85 11.176,70.426 58.166,70.426

## Polygon pours and split planes (outlines as drawn)
GND on Top Layer "GND_L01_P000" (solid, remove dead copper, pour order 0): 5.588,72.39 62.738,72.39 62.738,19.685 5.588,19.685
GND on Bottom Layer "GND_L02_P001" (solid, remove dead copper, pour order 1): 7.046,72.771 62.738,72.771 62.738,19.685 7.046,19.685

## Keep-outs
Keep-Out Layer:
  lines w0.2: 6.858,24.511 ccw(c8.128,24.511) 8.128,23.241 8.509,23.241 40.005,23.241 cw(c40.005,21.971) 41.275,21.971 41.275,20.955 ccw(c42.545,20.955) 42.545,19.685 61.468,19.685 ccw(c61.468,20.955) 62.738,20.955 62.738,71.374 ccw(c61.468,71.374) 61.468,72.644 8.128,72.644 ccw(c8.128,71.374) 6.858,71.374 6.858,24.511

## Silkscreen, mask and mechanical layers (free items; w line width, h text height)
Top Overlay:
  text "LARA-R6 Breakout Board" at 48.494,62.228 h1
Top Solder: